# Altium PCB PCB.PcbDoc
Units mm, origin at the board's own origin, x right, y up, seen from the top; angles counter-clockwise.
Board outline 160 x 65 mm, 4 copper layers (Component Side, Ground Plane, Power Plane, Solder Side), stack 1.044 mm thick; 186 components, 132 nets, 803 pads, 49 vias.
Unrouted connection lines stored in the file: 493.
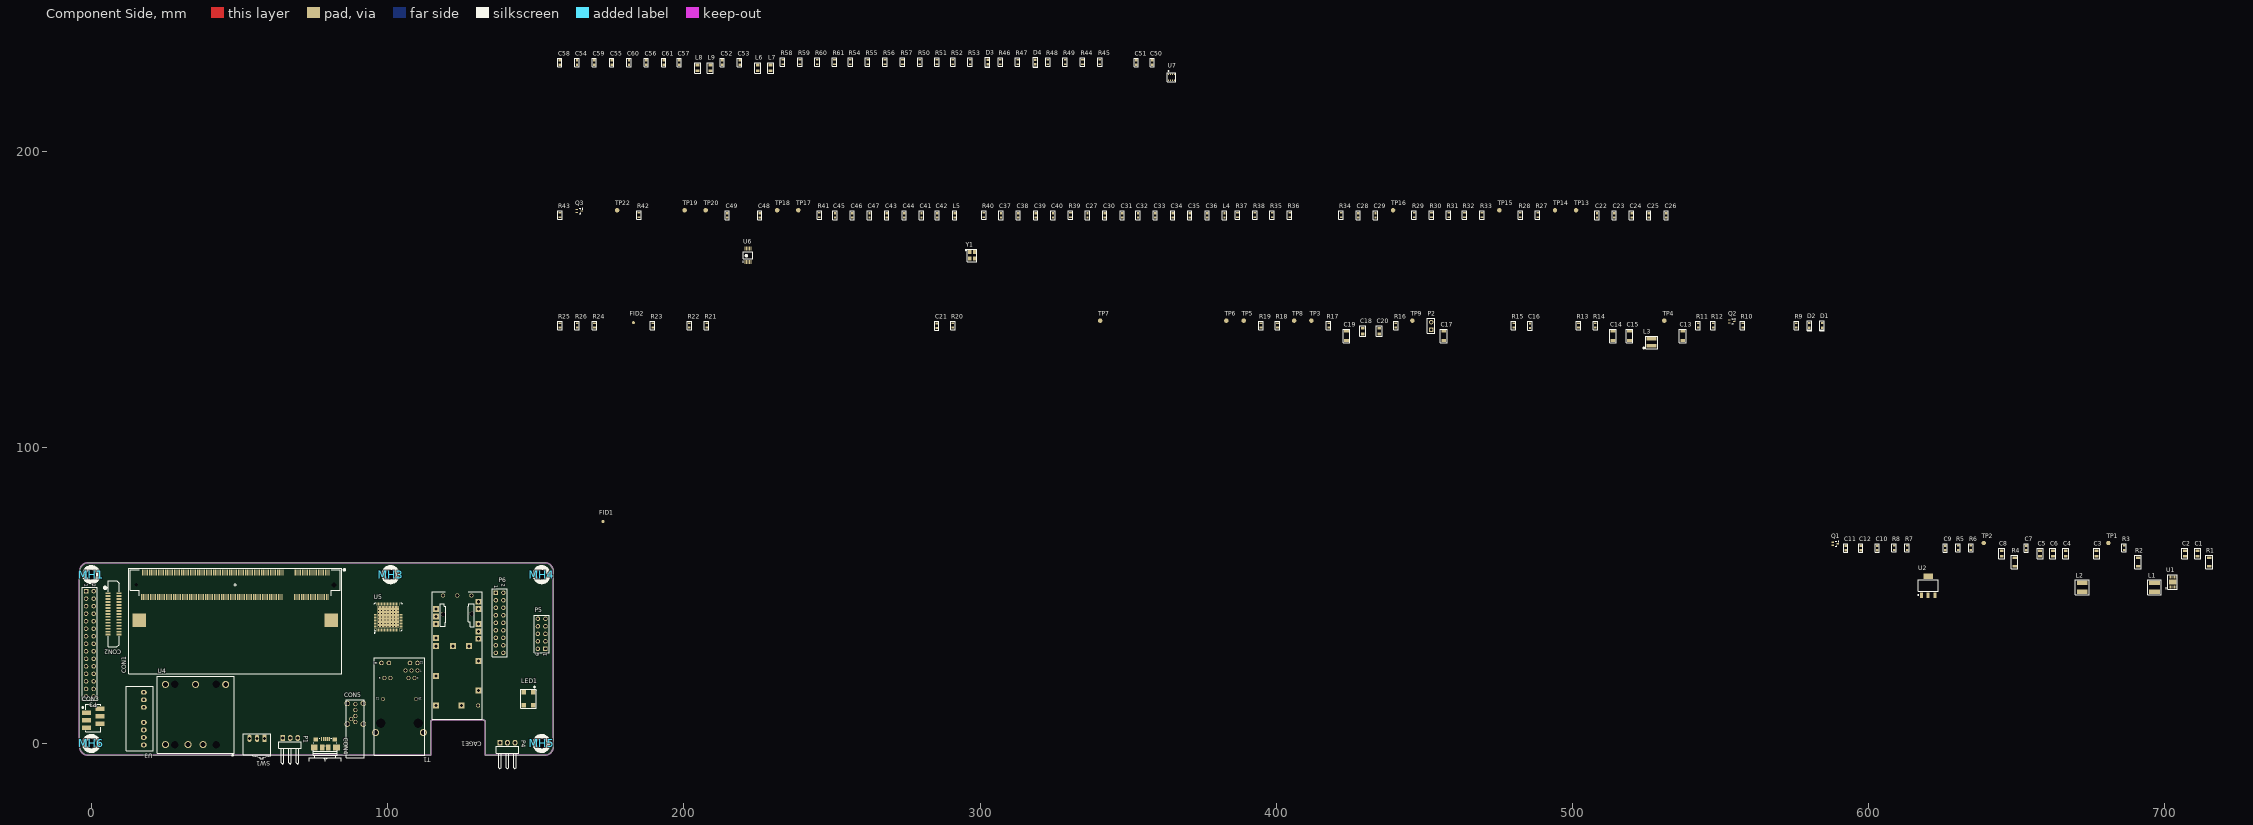
[diagram p0: Component Side view]
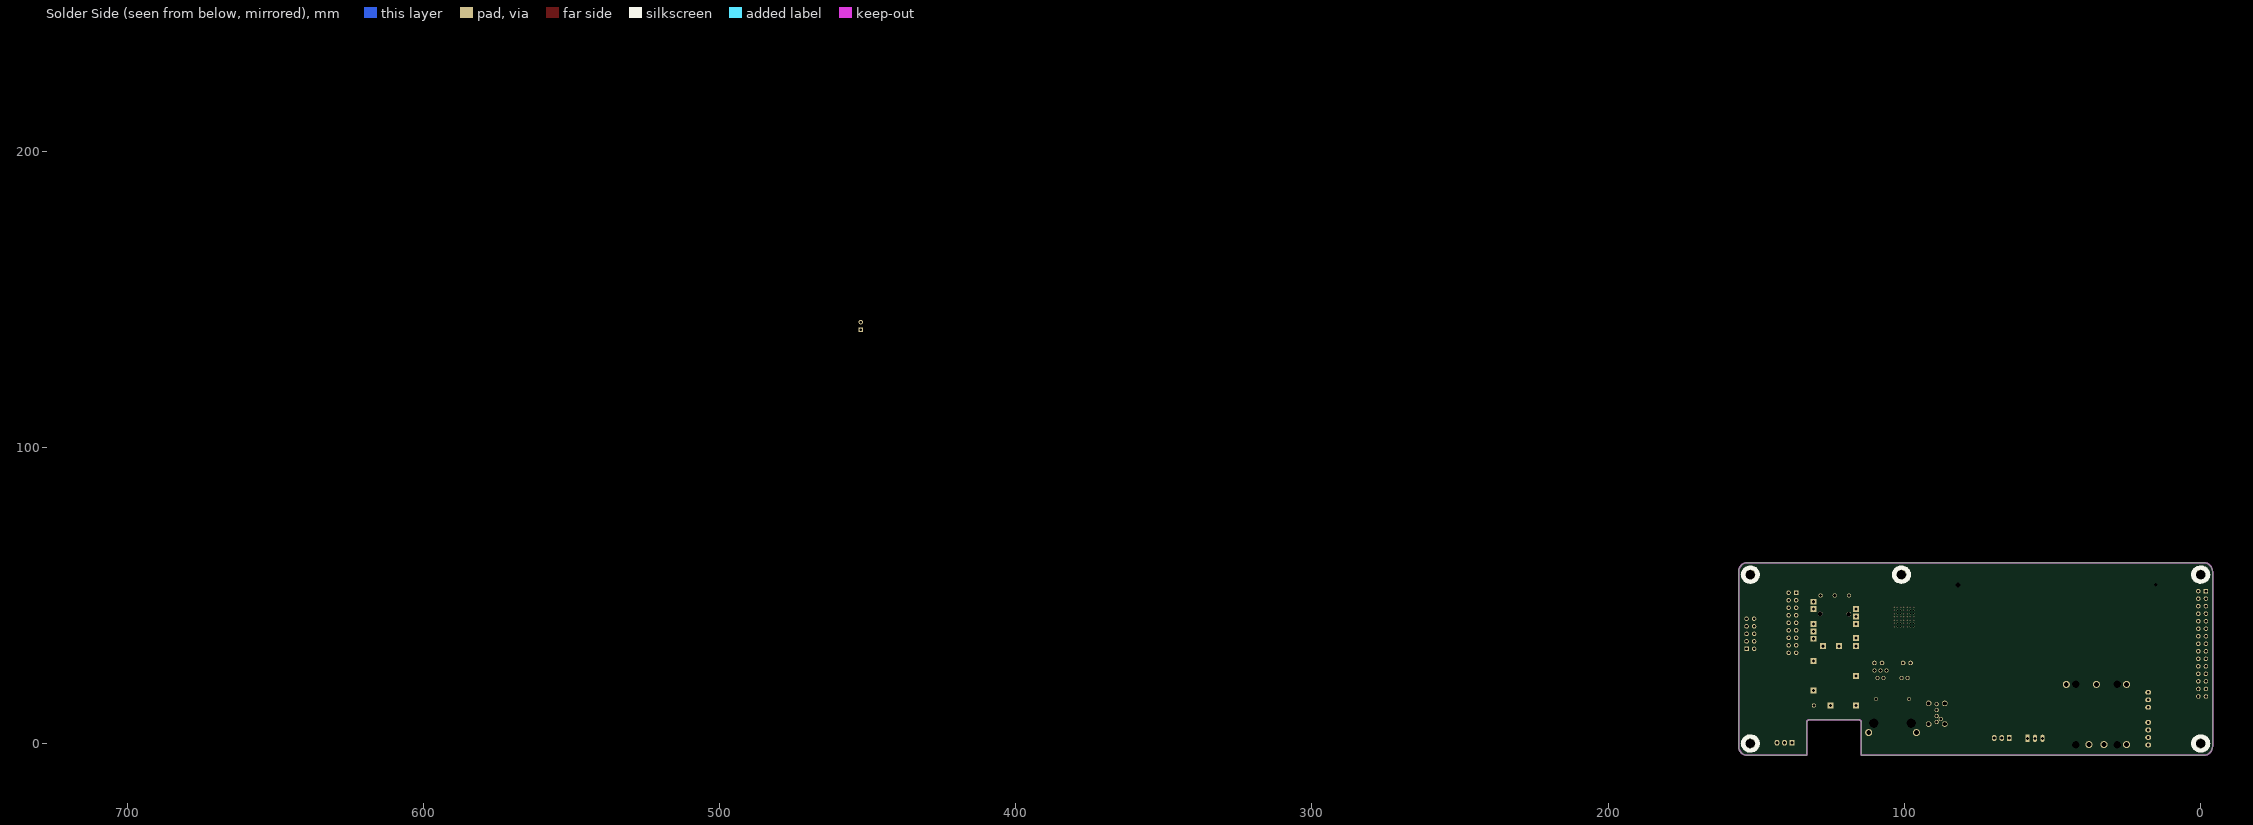
[diagram p1: Solder Side view, seen from below]
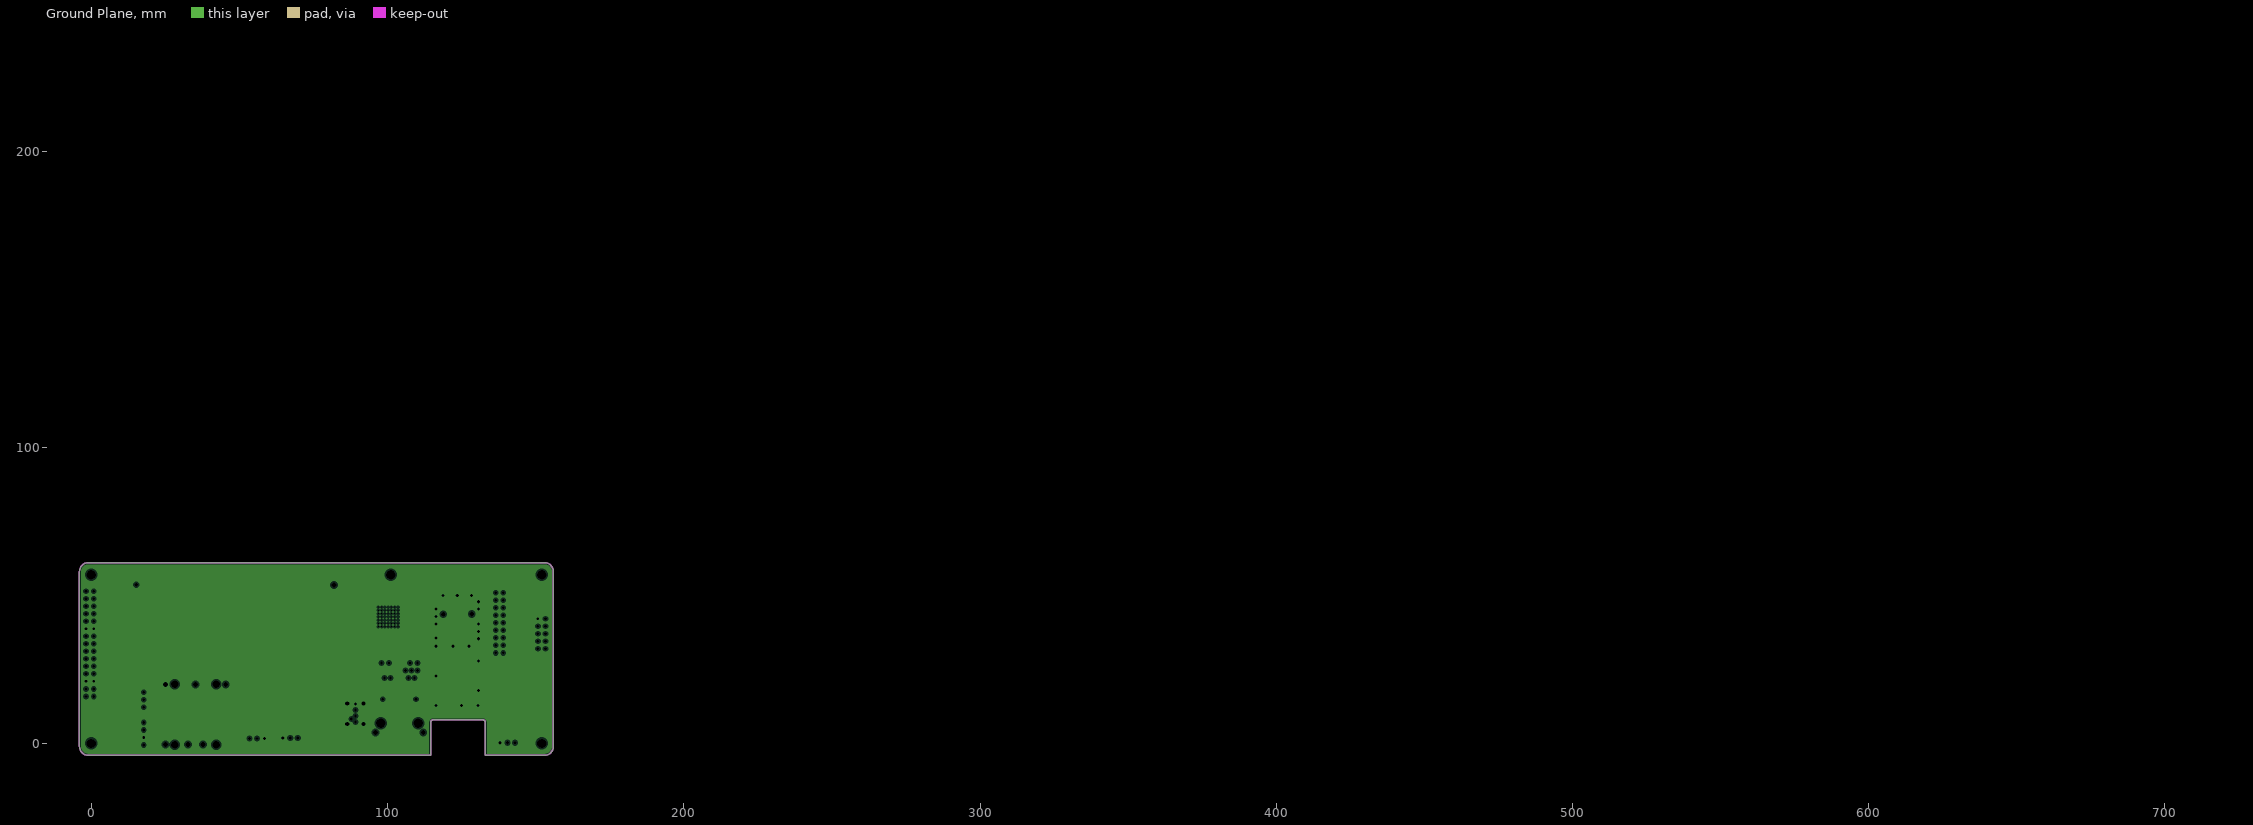
[diagram p2: Ground Plane, clearances drawn from the general rule]

## Layer stack, top to bottom
Top Solder: solder mask 0.0102, Solder Resist, Dk 3.5
Component Side: signal copper 0.04
Dielectric 1: core 0.24, FR-4, Dk 4.6
Ground Plane: plane copper 0.035, net GND
Dielectric 3: prepreg 0.4, R-1755M, Dk 4.6
Power Plane: signal copper 0.035
Dielectric 4: core 0.254, Dk 4.2
Solder Side: signal copper 0.04
Bottom Solder: solder mask 0.0102, Solder Resist, Dk 3.5

## Board outline
-4,58 -4,-1 -3.942,-1.585 -3.772,-2.148 -3.494,-2.667 -3.121,-3.121 -2.667,-3.494 -2.148,-3.772 -1.585,-3.942 -1,-4 114.5,-4 114.5,7 114.525,7.223 114.599,7.434 114.718,7.623 114.877,7.782 115.066,7.901 115.277,7.975 115.5,8 132,8 132.223,7.975 132.434,7.901 132.623,7.782 132.782,7.623 132.901,7.434 132.975,7.223 133,7 133,-4 153,-4 153.585,-3.942 154.148,-3.772 154.667,-3.494 155.121,-3.121 155.494,-2.667 155.772,-2.148 155.942,-1.585 156,-1 156,58 155.942,58.585 155.772,59.148 155.494,59.667 155.121,60.121 154.667,60.494 154.148,60.772 153.585,60.942 153,61 -1,61 -1.585,60.942 -2.148,60.772 -2.667,60.494 -3.121,60.121 -3.494,59.667 -3.772,59.148 -3.942,58.585

## Design rules (kind name [scope] priority, off if disabled: settings)
Clearance [All] p1: gap=0.152 except(0.03: SMDPad-SMDPad)
ComponentClearance [All] p1: gap=0 collisioncheckmode=3 verticalgap=0 showdistances=TRUE
DiffPairsRouting DiffPairsRouting_ETH [InDifferentialPairClass('ETH_100')] p1: maxlimit=0.213 minlimit=0.195 mostfreqgap=0.203 toplayer_minwidth=0.249 toplayer_maxwidth=0.274 toplayer_prefwidth=0.251 midlayer1_minwidth=0.249 midlayer1_maxwidth=0.274 midlayer1_prefwidth=0.251 bottomlayer_mingap=0.203 bottomlayer_minwidth=0.249 bottomlayer_maxwidth=0.274 bottomlayer_prefwidth=0.251 maxuncoupledlength=12.7
DiffPairsRouting DiffPairsRouting_USB [InDifferentialPairClass('USB_90')] p2: maxlimit=0.3 minlimit=0.19 mostfreqgap=0.254 toplayer_mingap=0.254 toplayer_maxgap=0.254 toplayer_minwidth=0.322 toplayer_maxwidth=0.347 toplayer_prefwidth=0.33 midlayer1_prefgap=0.203 midlayer1_minwidth=0.322 midlayer1_maxwidth=0.347 midlayer1_prefwidth=0.33 bottomlayer_mingap=0.254 bottomlayer_maxgap=0.254 bottomlayer_minwidth=0.322 bottomlayer_maxwidth=0.347 bottomlayer_prefwidth=0.33 maxuncoupledlength=12.7
DiffPairsRouting [All] p3: maxlimit=0.254 minlimit=0.152 mostfreqgap=0.254 toplayer_minwidth=0.152 toplayer_maxwidth=0.381 toplayer_prefwidth=0.203 midlayer1_mingap=0.254 midlayer1_minwidth=0.381 midlayer1_maxwidth=0.381 midlayer1_prefwidth=0.381 bottomlayer_minwidth=0.152 bottomlayer_maxwidth=0.381 bottomlayer_prefwidth=0.203 maxuncoupledlength=12.7
HoleSize [All] p1: absolutevalues=TRUE maxlimit=5 minlimit=0.3 maxpercent=80.000 minpercent=20.000
MatchedLengths camera [InDifferentialPairClass('CAMERA_DIFF')] p1: tolerance=0.254 checknetsindiffpair=TRUE checkdiffpairvsdiffpair=FALSE checkxsignals=FALSE checkothers=FALSE
MinimumSolderMaskSliver [All] p1: minsoldermaskwidth=0.05
PlaneClearance [All] p1: clearance=0.508
PlaneConnect [All] p1: planeconnectstyle=Direct reliefexpansion=0.508 reliefentries=2 reliefconductorwidth=0.254 reliefairgap=0.254
PolygonConnect [All] p1: connectstyle=Relief reliefconductorwidth=0.254 reliefentries=4 polygonreliefangle="90 Angle" airgapwidth=0.254
RoutingVias [All] p1: holewidth=0.38 width=0.635 viastyle="Through Hole" minholewidth=0.3 minwidth=0.508 maxholewidth=0.711 maxwidth=1.27
SilkToSolderMaskClearance [IsPad] p1: minsilkscreentomaskgap=0 clearancetoexposedcopper=TRUE
SolderMaskExpansion [All] p1: expansion=0.102
Width [All] p1: maxlimit=3 minlimit=0.152 preferedwidth=0.203 toplayer_maxwidth=2 bottomlayer_maxwidth=2 minimp=50.000000 maximp=50.000000 favimp=50.000000
23 further rules are at their usual default settings.

## Classes and differential pairs
differential pair class ETH_100: ETH_RX ETH_TX
differential pair class USB_90: USB_2 USB_CM USB_H USB_HUB USB_PROG USB_SW
component class "PAGE3 - HUB, USB, ETH": C22 C23 C24 C25 C26 C27 C28 C29 C30 C31 C32 C33 C34 C35 C36 C37 C38 C39 C40 C41 C42 C43 C44 C45 C46 C47 C48 C49 CON4 CON5 L4 L5 Q3 R27 R28 R29 R30 R31 R32 R33 R34 R35 R36 R37 R38 R39 R40 R41 R42 R43 T1 TP13 TP14 TP15 TP16 TP17 TP18 TP19 TP20 TP22 U5 U6 Y1
component class "PAGE2 - PWR, MODULE": C1 C2 C3 C4 C5 C6 C7 C8 C9 C10 C11 C12 C13 C14 C15 C16 C17 C18 C19 C20 C21 CON1 CON2 CON3 D1 D2 FID1 FID2 L1 L2 L3 LED1 MH1 MH3 MH4 MH5 MH6 P1 P2 P3 P4 P5 Q1 Q2 R1 R2 R3 R4 R5 R6 R7 R8 R9 R10 R11 R12 R13 R14 R15 R16 R17 R18 R19 R20 R21 R22 R23 R24 R25 R26 SW1 TP1 TP2 TP3 TP4 TP5 TP6 TP7 TP8 TP9 U1 U2 U3 U4
net class CAMERA_DIFF_100: CAM1_C_N CAM1_C_P CAM1_D0_N CAM1_D0_P CAM1_D1_N CAM1_D1_P
differential pair class CAMERA_DIFF_100: CAM1_C CAM1_D0 CAM1_D1
component class "PAGE4 - SFP": C50 C51 C52 C53 C54 C55 C56 C57 C58 C59 C60 C61 CAGE1 D3 D4 L6 L7 L8 L9 P6 R44 R45 R46 R47 R48 R49 R50 R51 R52 R53 R54 R55 R56 R57 R58 R59 R60 R61 U7
differential pair USB_SW: +USB_SW_P -USB_SW_N
differential pair USB_PROG: +USB_PROG_P -USB_PROG_N
differential pair USB_HUB: +USB_HUB_P -USB_HUB_N
differential pair USB_H: +USB_H_P -USB_H_N
differential pair USB_CM: +USB_CM_P -USB_CM_N
differential pair USB_2: +USB_2_P -USB_2_N
differential pair CAM1_D1: +CAM1_D1_P -CAM1_D1_N
differential pair CAM1_D0: +CAM1_D0_P -CAM1_D0_N
differential pair CAM1_C: +CAM1_C_P -CAM1_C_N
differential pair ETH_RX: +ETH_RX_P -ETH_RX_N
differential pair ETH_TX: +ETH_TX_P -ETH_TX_N

## Components (designator, comment, footprint, x,y, rotation, side; value= is the part's Value field where it differs from the comment)
C1 "47uF /10V" CAP0805 711.01,64.124 r90 top
C2 "10uF /16V" CAP0805 706.756,64.124 r90 top
C3 "47uF /10V" CAP0805 676.911,64.124 r90 top
C4 "10uF /16V" CAP0805 666.497,64.124 r90 top
C5 "10uF /16V" CAP0805 657.861,64.124 r90 top
C6 "10uF /16V" CAP0805 662.179,64.124 r90 top
C7 "100nF" CAP0603 653.225,65.965 r90 top
C8 "47uF /10V" CAP0805 644.907,64.124 r90 top
C9 "1uF /16V" CAP0603 625.793,65.965 r90 top
C10 "1uF /16V" CAP0603 602.933,65.965 r90 top
C11 "10uF /16V" CAP0603 592.265,65.965 r90 top
C12 "10uF /16V" CAP0603 597.345,65.965 r90 top
C13 "220pF /2kV" CAP1206 537.211,137.593 r90 top
C14 "10uF /50V" CAP1206 513.652,137.593 r90 top
C15 "10uF /50V" CAP1206 519.24,137.593 r90 top
C16 "100nF" CAP0603 485.649,141.022 r90 top
C17 "220pF /2kV" CAP1206 456.502,137.593 r90 top
C18 "1uF /16V" CAP0805 429.197,139.181 r90 top
C19 "10uF /50V" CAP1206 423.736,137.593 r90 top
C20 "10uF /16V" CAP0805 434.785,139.181 r90 top
C21 "100nF" CAP0603 285.433,141.022 r90 top
C22 "20pF" CAP0603 508.255,178.297 r90 top
C23 "20pF" CAP0603 514.097,178.297 r90 top
C24 "20pF" CAP0603 519.939,178.297 r90 top
C25 "20pF" CAP0603 525.781,178.297 r90 top
C26 "100nF" CAP0603 531.623,178.297 r90 top
C27 "100nF" CAP0603 336.297,178.297 r90 top
C28 "100nF" CAP0603 427.673,178.297 r90 top
C29 "100nF" CAP0603 433.515,178.297 r90 top
C30 "100nF" CAP0603 342.139,178.297 r90 top
C31 "100nF" CAP0603 347.981,178.297 r90 top
C32 "100nF" CAP0603 353.315,178.297 r90 top
C33 "100nF" CAP0603 359.157,178.297 r90 top
C34 "100nF" CAP0603 364.999,178.297 r90 top
C35 "100nF" CAP0603 370.841,178.297 r90 top
C36 "100nF" CAP0603 376.683,178.297 r90 top
C37 "100nF" CAP0603 307.087,178.297 r90 top
C38 "100nF" CAP0603 312.929,178.297 r90 top
C39 "100nF" CAP0603 318.771,178.297 r90 top
C40 "100nF" CAP0603 324.613,178.297 r90 top
C41 "33pF" CAP0603 280.226,178.297 r90 top
C42 "33pF" CAP0603 285.56,178.297 r90 top
C43 "1uF /16V" CAP0603 268.542,178.297 r90 top
C44 "100nF" CAP0603 274.384,178.297 r90 top
C45 "100nF" CAP0603 251.016,178.297 r90 top
C46 "100nF" CAP0603 256.858,178.297 r90 top
C47 "10uF /16V" CAP0603 262.7,178.297 r90 top
C48 "100nF" CAP0603 225.616,178.297 r90 top
C49 "10uF /16V" CAP0603 214.694,178.297 r90 top
C50 "100nF" CAP0603 358.077,229.922 r90 top
C51 "100nF" CAP0603 352.743,229.922 r90 top
C52 "100nF" CAP0603 212.98,229.922 r90 top
C53 "100nF" CAP0603 218.822,229.922 r90 top
C54 "10uF /16V" CAP0603 163.958,229.922 r90 top
C55 "10uF /16V" CAP0603 175.642,229.922 r90 top
C56 "10uF /16V" CAP0603 187.326,229.922 r90 top
C57 "10uF /16V" CAP0603 198.502,229.922 r90 top
C58 "100nF" CAP0603 158.116,229.922 r90 top
C59 "100nF" CAP0603 169.8,229.922 r90 top
C60 "100nF" CAP0603 181.484,229.922 r90 top
C61 "100nF" CAP0603 193.168,229.922 r90 top
CAGE1 "SFP_CAGE" PCB_SFP_CAGE_FOOTPRINT 120.147,39.577 r270 top locked
CON1 "1473005-4" BTB-SM0-6-2V200 48.577,53.567 r180 top
CON2 "1-1734248-5" 1-1734248-5 5.651,50.752 r270 top
CON3 "MICROMATCH 6 SMD" MICROMATCH2X3 -1.587,10.414 r90 top
CON4 "10104110-0001LF" 10118193 78.985,1.516 r0 top
CON5 "USB A, Right angle" "USB A, TH, RIGHT ANGLE" 89.101,7.271 r0 top
D1 "LED RED" LED0603 584.264,141.149 r90 top
D2 "LED RED" LED0603 579.946,141.149 r90 top
D3 "LED RED" LED0603 302.578,230.049 r90 top
D4 "LED RED" LED0603 318.644,230.049 r90 top
FID1 "FID_1MMC" FID_40X120D 172.72,74.93 r0 top
FID2 "FID_1MMC" FID_40X120D 183.008,142.038 r90 top
L1 "SRN4018-4R7M" INDP4040X18N 696.469,52.694 r90 top
L2 "SRN4018-4R7M" INDP4040X18N 672.085,52.694 r90 top
L3 "10uH / 500mA" IND1212 526.733,135.434 r90 top
L4 "BLM18EG221SN1D" CAP0603 382.525,178.297 r90 top
L5 "BLM18EG221SN1D" CAP0603 291.402,178.297 r90 top
L6 "1uH" CAP0805 224.981,228.081 r90 top
L7 "1uH" CAP0805 229.299,228.081 r90 top
L8 "1uH" CAP0805 204.661,228.081 r90 top
L9 "1uH" CAP0805 208.979,228.081 r90 top
LED1 "LED RGB WS2812" LED_SMD5050 147.574,15.05 r90 top
MH1 "MH_7.4MMNC_3.2MMD" MH_7.4MMD_3.2MMD_NON_COPPER_NPTH 0,57 r0 top
MH3 "MH_7.4MMNC_3.2MMD" MH_7.4MMD_3.2MMD_NON_COPPER_NPTH 101,57 r0 top
MH4 "MH_7.4MMNC_3.2MMD" MH_7.4MMD_3.2MMD_NON_COPPER_NPTH 152,57 r0 top
MH5 "MH_7.4MMNC_3.2MMD" MH_7.4MMD_3.2MMD_NON_COPPER_NPTH 152,0 r0 top
MH6 "MH_7.4MMNC_3.2MMD" MH_7.4MMD_3.2MMD_NON_COPPER_NPTH 0,0 r0 top
P1 "HDR1X3" HDR1X3H 64.579,1.841 r0 top
P2 "Header 2" HDR1X2 452.311,139.689 r90 top
P3 "MHDR2X15" HDR2X15 -1.778,51.435 r270 top
P4 "HDR1X3" HDR1X3H 137.922,0.254 r0 top
P5 "HDR2X5" HDR2X5_CEN 153.289,31.941 r90 top
P6 "HED2X9" HDR2X9 136.561,50.896 r270 top locked
Q1 "DMG1012T-7" DMG1012T-7 588.709,67.426 r0 top
Q2 "DMG1012T-7" DMG1012T-7 553.784,142.483 r0 top
Q3 "DMG1012T-7" DMG1012T-7 164.72,179.757 r0 top
R1 "0R" RES1206 714.947,61.266 r90 top
R2 "0R" RES1206 690.944,61.266 r90 top
R3 "100k" RES0603 686.245,66.092 r90 top
R4 "0R" RES1206 649.288,61.266 r90 top
R5 "100k" RES0603 630.175,66.092 r90 top
R6 "100k" RES0603 634.493,66.092 r90 top
R7 "470R" RES0603 612.966,66.092 r90 top
R8 "470R" RES0603 608.585,66.092 r90 top
R9 "47k" RES0603 575.565,141.149 r90 top
R10 "100k" RES0603 557.467,141.149 r90 top
R11 "1K8" RES0603 542.418,141.149 r90 top
R12 "1K8" RES0603 547.498,141.149 r90 top
R13 "1K8" RES0603 502.032,141.149 r90 top
R14 "1K8" RES0603 507.683,141.149 r90 top
R15 "0R" RES0603 480.124,141.149 r90 top
R16 "0R" RES0603 440.373,141.149 r90 top
R17 "0R" RES0603 417.704,141.149 r90 top
R18 "0R" RES0603 400.432,141.149 r90 top
R19 "0R" RES0603 394.844,141.149 r90 top
R20 "470R" RES0603 290.831,141.149 r90 top
R21 "0R" RES0603 207.709,141.149 r90 top
R22 "0R" RES0603 201.867,141.149 r90 top
R23 "0R" RES0603 189.485,141.149 r90 top
R24 "0R" RES0603 169.863,141.149 r90 top
R25 "0R" RES0603 158.179,141.149 r90 top
R26 "0R" RES0603 164.021,141.149 r90 top
R27 "0R" RES0603 488.252,178.424 r90 top
R28 "0R" RES0603 482.41,178.424 r90 top
R29 "49.9R" RES0603 446.533,178.424 r90 top
R30 "49.9R" RES0603 452.375,178.424 r90 top
R31 "49.9R" RES0603 458.217,178.424 r90 top
R32 "49.9R" RES0603 463.551,178.424 r90 top
R33 "10R" RES0603 469.456,178.424 r90 top
R34 "10k" RES0603 421.895,178.424 r90 top
R35 "1k" RES0603 398.59,178.424 r90 top
R36 "1k" RES0603 404.496,178.424 r90 top
R37 "12k4" RES0603 386.906,178.424 r90 top
R38 "10k" RES0603 392.748,178.424 r90 top
R39 "1M" RES0603 330.518,178.424 r90 top
R40 "12k" RES0603 301.308,178.424 r90 top
R41 "10k" RES0603 245.746,178.424 r90 top
R42 "47k" RES0603 184.849,178.424 r90 top
R43 "47k" RES0603 158.179,178.424 r90 top
R44 "470R" RES0603 334.582,230.049 r90 top
R45 "470R" RES0603 340.424,230.049 r90 top
R46 "0R" RES0603 306.833,230.049 r90 top
R47 "0R" RES0603 312.675,230.049 r90 top
R48 "0R" RES0603 322.898,230.049 r90 top
R49 "0R" RES0603 328.74,230.049 r90 top
R50 "0R" RES0603 279.655,230.049 r90 top
R51 "0R" RES0603 285.497,230.049 r90 top
R52 "0R" RES0603 290.831,230.049 r90 top
R53 "0R" RES0603 296.673,230.049 r90 top
R54 "0R" RES0603 256.223,230.049 r90 top
R55 "0R" RES0603 262.065,230.049 r90 top
R56 "0R" RES0603 267.907,230.049 r90 top
R57 "0R" RES0603 273.813,230.049 r90 top
R58 "1K8" RES0603 233.363,230.049 r90 top
R59 "1K8" RES0603 239.205,230.049 r90 top
R60 "1K8" RES0603 245.047,230.049 r90 top
R61 "1K8" RES0603 250.889,230.049 r90 top
SW1 "Switch right angle" "SW ANGLE 3PIN" 60.484,-3.785 r270 top
T1 "Ethernet RJ45" 0826-1L1T-57-F 109.088,22.098 r180 top
TP1 "TEST_POINT" TEST_POINT 680.911,67.68 r0 top
TP2 "TEST_POINT" TEST_POINT 638.811,67.68 r90 top
TP3 "TEST_POINT" TEST_POINT 411.862,142.737 r90 top
TP4 "TEST_POINT" TEST_POINT 530.988,142.737 r90 top
TP5 "TEST_POINT" TEST_POINT 389.002,142.737 r90 top
TP6 "TEST_POINT" TEST_POINT 383.16,142.737 r90 top
TP7 "TEST_POINT" TEST_POINT 340.551,142.737 r90 top
TP8 "TEST_POINT" TEST_POINT 406.02,142.737 r90 top
TP9 "TEST_POINT" TEST_POINT 445.961,142.737 r90 top
TP13 "TEST_POINT" TEST_POINT 501.206,180.011 r90 top
TP14 "TEST_POINT" TEST_POINT 494.094,180.011 r90 top
TP15 "TEST_POINT" TEST_POINT 475.298,180.011 r90 top
TP16 "TEST_POINT" TEST_POINT 439.421,180.011 r90 top
TP17 "TEST_POINT" TEST_POINT 238.634,180.011 r90 top
TP18 "TEST_POINT" TEST_POINT 231.522,180.011 r90 top
TP19 "TEST_POINT" TEST_POINT 200.28,180.011 r90 top
TP20 "TEST_POINT" TEST_POINT 207.392,180.011 r90 top
TP22 "TEST_POINT" TEST_POINT 177.483,180.011 r90 top
U1 "PAM2306AYPKE" WDFN12L 702.565,54.472 r0 top
U2 "REG1117" TI-DCY4_N 620.078,53.265 r90 top
U3 "ITX2409SA" DCDC_M1 17.716,17.272 r270 top
U4 "SPM15-050-Q12P-C" DCDC_M2 35.179,9.779 r90 top
U5 "LAN9512-JZX" QFN64 100.203,42.736 r90 top
U6 "FSUSB42MUX" MO-187 221.679,164.835 r90 top
U7 "BME280" "CAVITY MEMS" 364.618,224.969 r90 top
Y1 "25MHz" XTAL_SMALL 297.308,164.771 r90 top

## Footprints (in the part's own frame and the unit in brackets; to place one, negate y for a bottom-side part, rotate by r counter-clockwise, add the part's x,y. Pads: shape width x height; smd on the part's side, far side on the other; paste and mask are expansions set on the pad)
1-1734248-5 [mm] "flat cable connector"
  rect 0.6x1.65 smd: 1(0,3.725) 1(0,0) 2(1,3.725) 2(1,0) 3(2,3.725) 3(2,0) 4(3,3.725) 4(3,0) 5(4,3.725) 5(4,0) 6(5,3.725) 6(5,0) 7(6,3.725) 7(6,0) 8(7,0) 8(7,3.725) 9(8,0) 9(8,3.725) 10(9,0) 10(9,3.725) 11(10,0) 11(10,3.725) 12(11,0) 12(11,3.725) 13(12,0) 13(12,3.725) 14(13,0) 14(13,3.725) 15(14,0) 15(14,3.725)
  silkscreen extent -4.2,-1.37 18.17,3.81
0826-1L1T-57-F [mm] "Ethernet connector"
  round 1.408 hole 0.9: 1(0,0) 2(2.03,0) 5(8.12,0) 6(10.15,0) 7(-1.015,-2.54) 8(1.015,-2.54) 9(3.045,-2.54)
  round 1.25 hole 0.9: 10(-0.515,7.12) 11(10.665,7.12)
  round 1.53 hole 1.02: 12(-1.02,-5.08) 13(1.52,-5.08) 14(8.63,-5.08) 15(11.17,-5.08)
  round 2.4 hole 1.6: ""(-2.99,18.42) ""(13.14,18.42)
  round 0 hole 3.3 unplated: ""(-1.275,15.24) ""(11.425,15.24)
  silkscreen extent -3.43,-6.88 13.57,26.14, body extent -5.73,-6.87 15.89,26.15, height 16.34
10118193 [mm] "Creator MM"
  rect 0.4x1.4 smd mask+0.05: 1(-1.3,0) 2(-0.65,0) 3(0,0) 4(0.65,0) 5(1.3,0)
  rect 1.6x1.4 smd: 6(-3.2,-0.225) 7(3.2,-0.225)
  rect 2.3x1.9 smd: 8(-3.75,-2.85) 9(3.75,-2.85)
  rect 1.55x1.9 smd paste-10: 10(-1.025,-2.85) 11(1.025,-2.85)
  silkscreen extent -5.4,-7.47 5.4,0.27, body extent -4.04,-5.25 4.04,0.31, height 2.77
BTB-SM0-6-2V200 [mm]
  rect 0.35x2 smd: 1(-31.65,-4.1) 2(-31.35,4.1) 3(-31.05,-4.1) 4(-30.75,4.1) 5(-30.45,-4.1) 6(-30.15,4.1) 7(-29.85,-4.1) 8(-29.55,4.1) 9(-29.25,-4.1) 10(-28.95,4.1) 11(-28.65,-4.1) 12(-28.35,4.1) 13(-28.05,-4.1) 14(-27.75,4.1) 15(-27.45,-4.1) 16(-27.15,4.1) 17(-26.85,-4.1) 18(-26.55,4.1) 19(-26.25,-4.1) 20(-25.95,4.1) 21(-25.65,-4.1) 22(-25.35,4.1) 23(-25.05,-4.1) 24(-24.75,4.1) 25(-24.45,-4.1) 26(-24.15,4.1) 27(-23.85,-4.1) 28(-23.55,4.1) 29(-23.25,-4.1) 30(-22.95,4.1) 31(-22.65,-4.1) 32(-22.35,4.1) 33(-22.05,-4.1) 34(-21.75,4.1) 35(-21.45,-4.1) 36(-21.15,4.1) 37(-20.85,-4.1) 38(-20.55,4.1) 39(-20.25,-4.1) 40(-19.95,4.1) 41(-16.05,-4.1) 42(-15.75,4.1) 43(-15.45,-4.1) 44(-15.15,4.1) 45(-14.85,-4.1) 46(-14.55,4.1) 47(-14.25,-4.1) 48(-13.95,4.1) 49(-13.65,-4.1) 50(-13.35,4.1) 51(-13.05,-4.1) 52(-12.75,4.1) 53(-12.45,-4.1) 54(-12.15,4.1) 55(-11.85,-4.1) 56(-11.55,4.1) 57(-11.25,-4.1) 58(-10.95,4.1) 59(-10.65,-4.1) 60(-10.35,4.1) 61(-10.05,-4.1) 62(-9.75,4.1) 63(-9.45,-4.1) 64(-9.15,4.1) 65(-8.85,-4.1) 66(-8.55,4.1) 67(-8.25,-4.1) 68(-7.95,4.1) 69(-7.65,-4.1) 70(-7.35,4.1) 71(-7.05,-4.1) 72(-6.75,4.1) 73(-6.45,-4.1) 74(-6.15,4.1) 75(-5.85,-4.1) 76(-5.55,4.1) 77(-5.25,-4.1) 78(-4.95,4.1) 79(-4.65,-4.1) 80(-4.35,4.1) 81(-4.05,-4.1) 82(-3.75,4.1) 83(-3.45,-4.1) 84(-3.15,4.1) 85(-2.85,-4.1) 86(-2.55,4.1) 87(-2.25,-4.1) 88(-1.95,4.1) 89(-1.65,-4.1) 90(-1.35,4.1) 91(-1.05,-4.1) 92(-0.75,4.1) 93(-0.45,-4.1) 94(-0.15,4.1) 95(0.15,-4.1) 96(0.45,4.1) 97(0.75,-4.1) 98(1.05,4.1) 99(1.35,-4.1) 100(1.65,4.1) 101(1.95,-4.1) 102(2.25,4.1) 103(2.55,-4.1) 104(2.85,4.1) 105(3.15,-4.1) 106(3.45,4.1) 107(3.75,-4.1) 108(4.05,4.1) 109(4.35,-4.1) 110(4.65,4.1) 111(4.95,-4.1) 112(5.25,4.1) 113(5.55,-4.1) 114(5.85,4.1) 115(6.15,-4.1) 116(6.45,4.1) 117(6.75,-4.1) 118(7.05,4.1) 119(7.35,-4.1) 120(7.65,4.1) 121(7.95,-4.1) 122(8.25,4.1) 123(8.55,-4.1) 124(8.85,4.1) 125(9.15,-4.1) 126(9.45,4.1) 127(9.75,-4.1) 128(10.05,4.1) 129(10.35,-4.1) 130(10.65,4.1) 131(10.95,-4.1) 132(11.25,4.1) 133(11.55,-4.1) 134(11.85,4.1) 135(12.15,-4.1) 136(12.45,4.1) 137(12.75,-4.1) 138(13.05,4.1) 139(13.35,-4.1) 140(13.65,4.1) 141(13.95,-4.1) 142(14.25,4.1) 143(14.55,-4.1) 144(14.85,4.1) 145(15.15,-4.1) 146(15.45,4.1) 147(15.75,-4.1) 148(16.05,4.1) 149(16.35,-4.1) 150(16.65,4.1) 151(16.95,-4.1) 152(17.25,4.1) 153(17.55,-4.1) 154(17.85,4.1) 155(18.15,-4.1) 156(18.45,4.1) 157(18.75,-4.1) 158(19.05,4.1) 159(19.35,-4.1) 160(19.65,4.1) 161(19.95,-4.1) 162(20.25,4.1) 163(20.55,-4.1) 164(20.85,4.1) 165(21.15,-4.1) 166(21.45,4.1) 167(21.75,-4.1) 168(22.05,4.1) 169(22.35,-4.1) 170(22.65,4.1) 171(22.95,-4.1) 172(23.25,4.1) 173(23.55,-4.1) 174(23.85,4.1) 175(24.15,-4.1) 176(24.45,4.1) 177(24.75,-4.1) 178(25.05,4.1) 179(25.35,-4.1) 180(25.65,4.1) 181(25.95,-4.1) 182(26.25,4.1) 183(26.55,-4.1) 184(26.85,4.1) 185(27.15,-4.1) 186(27.45,4.1) 187(27.75,-4.1) 188(28.05,4.1) 189(28.35,-4.1) 190(28.65,4.1) 191(28.95,-4.1) 192(29.25,4.1) 193(29.55,-4.1) 194(29.85,4.1) 195(30.15,-4.1) 196(30.45,4.1) 197(30.75,-4.1) 198(31.05,4.1) 199(31.35,-4.1) 200(31.65,4.1)
  rect 4.5x4.6 smd: MP1(-32.45,12) MP2(32.45,12)
  round 0 hole 1.7 unplated: ""(-33.4,0)
  round 0 hole 1.2 unplated: ""(33.4,0)
  silkscreen extent -37.13,-5.59 36,29.97, body extent -35.75,-5 35.75,29.7, height 5.31
CAP0603 [mm]
  rect 0.8x0.8 smd: 1(-0.75,0) 2(0.75,0)
  silkscreen extent -1.46,-0.7 1.46,0.7, body extent -0.8,-0.4 0.8,0.4, height 0.9
CAP0805 [mm]
  rect 0.9x1.3 smd: 1(-0.95,0) 2(0.95,0)
  silkscreen extent -1.78,-1.02 1.78,1.02, body extent -1,-0.6 1,0.6, height 1.5
CAP1206 [mm]
  rect 0.9x1.6 smd: 1(-1.55,0) 2(1.55,0)
  silkscreen extent -2.29,-1.14 2.29,1.14, body extent -1.6,-0.8 1.6,0.8, height 0.94
"CAVITY MEMS" [mm]
  rect 0.5x0.35 smd: 1(1.025,0.975) 2(1.025,0.325) 3(1.025,-0.325) 4(1.025,-0.975) 5(-1.025,-0.975) 6(-1.025,-0.325) 7(-1.025,0.325) 8(-1.025,0.975)
  silkscreen extent -1.5,-1.37 2.1,1.38, body extent -1.25,-1.25 1.25,1.25, height 0.93
DCDC_M1 [mm]
  oval 1.6x2 hole 0.9: 1(0,0) 2(2.54,0) 3(5.08,0) 5(10.16,0) 6(12.7,0) 7(15.24,0) 8(17.78,0)
  silkscreen extent -2,-6 19.78,3.2, body extent -2,-6 19.78,3.2, height 10.6
DCDC_M2 [mm]
  round 2.4 hole 1.6: 1(-10.16,-2.54) 2(-10.16,2.54) 3(10.16,-10.16) 4(10.16,0) 5(10.16,10.16) 6(-10.16,10.16)
  round 0 hole 2.54 unplated: ""(-10.16,-6.98) ""(-10.16,6.99) ""(10.16,-6.98) ""(10.16,6.99)
  silkscreen extent -14,-13 13,13, body extent -13,-13 13,13, height 10.41
DMG1012T-7 [mm] "SOT23, 3-Leads, Body 1.60x1.60mm, Pitch 0.50mm, IPC Medium Density"
  rect 0.85x0.4 smd: 1(0.85,0) 2(-0.85,0.5) 3(-0.85,-0.5)
  silkscreen extent -0.08,-0.85 1.2,0.87, body extent -0.97,-0.85 0.98,0.85, height 0.8
FID_40X120D [mil]
  round 40 smd paste-40 mask+40: 1(0,0)
HDR1X2 [mm] "Connector; Header; 2 Position"
  rect 1.5x1.5 hole 0.9: 1(0,0)
  round 1.5 hole 0.9: 2(2.54,0)
  silkscreen extent -1.27,-1.27 3.81,1.27
HDR1X3H [mm] "Connector; Header; 3 Position; Right Angle"
  rect 1.6x2 hole 1.1: 1(0,0)
  oval 1.6x2 hole 1.1: 2(2.54,0) 3(5.08,0)
  silkscreen extent -1.27,-8.85 6.35,-1.27, body extent -1.33,-10.14 6.29,0.34, height 3.1
HDR2X5_CEN [mm] "Connector; Header; 5x2 Position"
  rect 1.5x1.5 hole 0.9: 1(0,0)
  round 1.5 hole 0.9: 2(2.54,0) 3(5.08,0) 4(7.62,0) 5(10.16,0) 6(0,2.54) 7(2.54,2.54) 8(5.08,2.54) 9(7.62,2.54) 10(10.16,2.54)
  silkscreen extent -1.27,-1.27 11.43,3.81, body extent -1.27,-1.27 11.43,3.81, height 9.5
HDR2X9 [mm] "Connector; Header; 9x2 Position"
  rect 1.5x1.5 hole 0.9: 1(0,0)
  round 1.5 hole 0.9: 2(0,2.54) 3(2.54,0) 4(2.54,2.54) 5(5.08,0) 6(5.08,2.54) 7(7.62,0) 8(7.62,2.54) 9(10.16,0) 10(10.16,2.54) 11(12.7,0) 12(12.7,2.54) 13(15.24,0) 14(15.24,2.54) 15(17.78,0) 16(17.78,2.54) 17(20.32,0) 18(20.32,2.54)
  silkscreen extent -1.27,-1.27 21.59,3.81, body extent -1.27,-1.23 21.59,3.77, height 8.01
HDR2X15 [mm] "Connector; Header; 15x2 Position"
  rect 1.5x1.5 hole 0.9: 1(0,0)
  round 1.5 hole 0.9: 2(0,2.54) 3(2.54,0) 4(2.54,2.54) 5(5.08,0) 6(5.08,2.54) 7(7.62,0) 8(7.62,2.54) 9(10.16,0) 10(10.16,2.54) 11(12.7,0) 12(12.7,2.54) 13(15.24,0) 14(15.24,2.54) 15(17.78,0) 16(17.78,2.54) 17(20.32,0) 18(20.32,2.54) 19(22.86,0) 20(22.86,2.54) 21(25.4,0) 22(25.4,2.54) 23(27.94,0) 24(27.94,2.54) 25(30.48,0) 26(30.48,2.54) 27(33.02,0) 28(33.02,2.54) 29(35.56,0) 30(35.56,2.54)
  silkscreen extent -1.27,-1.27 36.83,3.81, body extent -1.27,-1.23 36.83,3.77, height 8.01
IND1212 [mm]
  rect 1.2x3.4 smd: 1(-1.2,0) 2(1.2,0)
  silkscreen extent -2.12,-2 2.1,2.92, body extent -1.51,-1.5 1.51,1.5, height 1.4
INDP4040X18N [mm] "Precision Wire Wound Inductor, 2-Leads, Body 4.00x4.00mm, IPC Medium Density"
  rect 1.5x3.6 smd: 1(-1.525,0) 2(1.525,0)
  silkscreen extent -2.5,-2.35 2.5,2.35, body extent -2.17,-2 2.03,2, height 1.9
LED0603 [mm]
  rect 0.8x0.8 smd: 1(-0.8,0) 2(0.8,0)
  silkscreen extent -1.78,-0.76 1.52,0.76, body extent -0.85,-0.4 0.85,0.4, height 0.66
LED_SMD5050 [mm]
  rect 1.5x1.5 smd: 1(2.2,-1.6) 2(2.2,1.6) 3(-2.2,1.6) 4(-2.2,-1.6)
  silkscreen extent -3.2,-2.6 4.2,2.6, body extent -2.7,-2.5 2.7,2.5, height 1.71
MH_7.4MMD_3.2MMD_NON_COPPER_NPTH [mm] "Creator MM"
  round 3.2 hole 3.2 unplated mask+0.025: 1(0,0)
  silkscreen extent -3,-3 3,3
MICROMATCH2X3 [mm]
  rect 1.5x3 smd: 1(0,0) 2(-2.54,0) 3(-5.08,0) 4(1.27,-4.5) 5(-1.27,-4.5) 6(-3.81,-4.5)
  silkscreen extent -6.5,-4.8 2.9,1.52, body extent -6.68,-5.95 2.87,1.17, height 5.26
MO-187 [mm] "MSOP, 10-Leads, Body 3.00x3.00mm, Pitch 0.50mm, IPC Medium Density"
  rect 1.35x0.3 smd: 1(-2.225,1) 2(-2.225,0.5) 3(-2.225,0) 4(-2.225,-0.5) 5(-2.225,-1) 6(2.225,-1) 7(2.225,-0.5) 8(2.225,0) 9(2.225,0.5) 10(2.225,1)
  silkscreen extent -2.35,-1.55 1.15,1.82, body extent -1.55,-1.55 1.55,1.55, height 1.1
PCB_SFP_CAGE_FOOTPRINT [mm]
  round 1.4 hole 1.067: 21(-10.387,8.163) 21(-10.387,-1.439) 21(-10.387,3.361) 21(26.75,10.425)
  rect 2x2 hole 1.05: 21(-8.279,10.499) 21(-5.764,10.499) 21(-5.764,-3.75) 21(-3.275,-3.75) 21(-0.786,10.499) 21(-0.786,-3.75) 21(1.729,10.499) 21(3.913,-3.75) 21(4.229,10.499) 21(6.733,7.324) 21(6.733,-3.75) 21(6.733,1.94) 21(11.736,10.499) 21(16.74,-3.75) 21(21.744,10.499) 21(26.748,-3.75) 21(26.748,4.835)
  round 1.55 hole 1.55 unplated: ""(-4.15,8.225) ""(-4.1,-1.4)
  silkscreen extent -11.66,-4.99 31.47,11.81, body extent -10.6,-4.62 38.2,11.22, height 10.67
QFN64 [mm]
  rect 0.95x0.25 smd: 1(-4.375,3.75) 2(-4.375,3.25) 3(-4.375,2.75) 4(-4.375,2.25) 5(-4.375,1.75) 6(-4.375,1.25) 7(-4.375,0.75) 8(-4.375,0.25) 9(-4.375,-0.25) 10(-4.375,-0.75) 11(-4.375,-1.25) 12(-4.375,-1.75) 13(-4.375,-2.25) 14(-4.375,-2.75) 15(-4.375,-3.25) 16(-4.375,-3.75) 33(4.375,-3.75) 34(4.375,-3.25) 35(4.375,-2.75) 36(4.375,-2.25) 37(4.375,-1.75) 38(4.375,-1.25) 39(4.375,-0.75) 40(4.375,-0.25) 41(4.375,0.25) 42(4.375,0.75) 43(4.375,1.25) 44(4.375,1.75) 45(4.375,2.25) 46(4.375,2.75) 47(4.375,3.25) 48(4.375,3.75)
  rect 0.25x0.95 smd: 17(-3.75,-4.375) 18(-3.25,-4.375) 19(-2.75,-4.375) 20(-2.25,-4.375) 21(-1.75,-4.375) 22(-1.25,-4.375) 23(-0.75,-4.375) 24(-0.25,-4.375) 25(0.25,-4.375) 26(0.75,-4.375) 27(1.25,-4.375) 28(1.75,-4.375) 29(2.25,-4.375) 30(2.75,-4.375) 31(3.25,-4.375) 32(3.75,-4.375) 49(3.75,4.375) 50(3.25,4.375) 51(2.75,4.375) 52(2.25,4.375) 53(1.75,4.375) 54(1.25,4.375) 55(0.75,4.375) 56(0.25,4.375) 57(-0.25,4.375) 58(-0.75,4.375) 59(-1.25,4.375) 60(-1.75,4.375) 61(-2.25,4.375) 62(-2.75,4.375) 63(-3.25,4.375) 64(-3.75,4.375)
  rect 7.3x7.3 smd: 65(0,0)
  silkscreen extent -5.47,-4.7 4.7,4.7, body extent -4.55,-4.55 4.55,4.55, height 1
RES0603 [mm]
  rect 0.6x0.9 smd: 1(-0.75,0) 2(0.75,0)
  silkscreen extent -1.4,-0.76 1.4,0.76, body extent -0.8,-0.42 0.8,0.42, height 0.8
RES1206 [mm]
  rect 0.9x1.6 smd: 1(-1.45,0) 2(1.45,0)
  silkscreen extent -2.2,-1.1 2.2,1.1, body extent -1.6,-0.8 1.6,0.8, height 1
"SW ANGLE 3PIN" [mm]
  oval 2.5x1.4 hole 1: 1(-5.5,-4.54) 3(-5.5,-7.08)
  rect 2.5x1.4 hole 1: 2(-5.5,-2)
  silkscreen extent -7,-9.28 1.3,0, body extent -4.9,-9.3 1.3,0, height 2.5
TEST_POINT [mm]
  round 1.5 smd: 1(0,0)
TI-DCY4_N [mm] "SOT223, 4-Leads, Body 6.5x3.5mm, Pitch 2.3mm, IPC Medium Density"
  rect 1.85x1 smd: 1(-3.175,2.3) 2(-3.175,0) 3(-3.175,-2.3)
  rect 1.85x3.2 smd: 2(3.175,0)
  silkscreen extent -3.3,-3.35 1.95,3.47, body extent -3.48,-3.25 3.48,3.25, height 1.69
"USB A, TH, RIGHT ANGLE" [mm]
  round 1.4 hole 1: 1(0,0) 2(0,2) 3(0,4) 4(0,6) 5(-1.36,1)
  round 1.9 hole 1.4: 6(-2.72,-0.73) 6(-2.72,6.27) 6(2.72,-0.73) 6(2.72,6.27)
  silkscreen extent -3,-12 3,7.5, body extent -3.5,-12.1 3.7,7.1, height 14.45
WDFN12L [mm] "Small 12L WDFN3x3 Package"
  rect 0.25x1 smd: 1(-1.125,-1.7) 2(-0.675,-1.7) 3(-0.225,-1.7) 4(0.225,-1.7) 5(0.675,-1.7) 6(1.125,-1.7) 7(1.125,1.7) 8(0.675,1.7) 9(0.225,1.7) 10(-0.225,1.7) 11(-0.675,1.7) 12(-1.125,1.7)
  rect 2.5x1.7 smd: 13(0,0)
  silkscreen extent -2.32,-2.45 1.6,2.45, body extent -1.5,-1.5 1.5,1.5, height 0.8
XTAL_SMALL [mm] "3.2 X 2.5 mm SMD crystal"
  rect 1.4x1.1 smd: 1(1.1,0.8) 2(-1.1,-0.8) 3(-1.1,0.8) 3(1.1,-0.8)
  silkscreen extent -2.1,-1.6 2.1,2.25, body extent -1.6,-1.25 1.6,1.25, height 0.7

## Part data
C1 C3 C8: library part GRM21BR61A476ME15L, "MURATA - GRM21BR61A476ME15L - CAP, MLCC, X5R, 47UF, 10V, 0805"
C2 C4 C5 C6 C20: library part CGA4J1X5R1C106K125AC, "TDK - CGA4J1X5R1C106K125AC - CAP, MLCC, X5R, 10UF, 16V, 0805"
C7 C16 C21 C26 C27 C30 C31 C32 C33 C34 C35 C36 C37 C38 C39 C40 C44 C45 C46 C48 C50 C51 C52 C53 C58 C59 C60 C61: "MURATA - GRM188R71C104KA01J - CAP, MLCC, X7R, 0.1UF, 16V, 0603"
C9 C10 C43: library part GRM188R61C105KA12D, "MURATA - GRM188R61C105KA12D - CAP, MLCC, X5R, 1UF, 16V, 0603"
C11 C12 C47 C49 C54 C55 C56 C57: library part GRM188R61C106MA73D, "MURATA - GRM188R61C106MA73D - CAP, MLCC, X5R, 10UF, 16V, 0603"
C13 C17: library part C1206C221KGRACTU, "KEMET - C1206C221KGRACTU - CAP, MLCC, X7R, 220PF, 2KV, 1206"
C14 C15 C19: library part GRM31CR61H106KA12L, "MURATA - GRM31CR61H106KA12L - CAP, MLCC, X5R, 10UF, 50V, 1206"
C18: library part GRM21BR71C105KA01L, "MURATA - GRM21BR71C105KA01L - CAP, MLCC, X7R, 1UF, 16V, 0805"
C22 C23 C24 C25: library part GRM1885C1H200JA01D, "MURATA - GRM1885C1H200JA01D - CAPACITOR, MLCC, C0G, 20PF, 50V, 0603"
C28 C29: library part Cap, "Capacitor"
C41 C42: library part GRM1885C1H330JA01D, "MURATA - GRM1885C1H330JA01D - CAP, MLCC, C0G/NP0, 33PF, 50V, 0603"
CAGE1: library part SFP_CAGE_FOOTPRINT, "TE CONNECTIVITY - 2007194-1 - CAGE, 1X1, SFP+, PCI APPLICATIONS"
CON1: library part "RPi CM CON", "DDR2 SODIMM connector for Raspberry Pi compute module 1/3/3-Lite"
CON2: library part "Camera con 15 pin", "Raspberry Pi camera connector"
CON3: library part 188275-6, "AMP - TE CONNECTIVITY - 188275-6 - CONNECTOR, RCPT, 6POS, 2ROW, 1.27MM"
CON4: "AMPHENOL FCI - 10104110-0001LF - MICRO USB, 2.0 TYPE B, RECEPTACLE, SMT"
CON5: library part 73725-0110BLF, "AMPHENOL FCI - 73725-0110BLF - USB, 2.0 TYPE A, RECEPTACLE, TH"
D1 D2 D3 D4: library part HSMS-C190, "BROADCOM LIMITED - HSMS-C190 - LED, RED, 10MCD, 626NM"
FID1 FID2: "Fiducial 40mil Diameter, 120mil Mask"
L1 L2: library part Inductor
L3: library part LQH3NPN100MG0L, "Fixed Inductors 1212 10uH 20%"
L4 L5: "MURATA - BLM18EG221SN1D - FERRITE BEAD, 0.05OHM, 2A, 0603"
L6 L7 L8 L9: library part 74479773210, "WURTH ELEKTRONIK - 74479773210 - INDUCTOR, MULTILAYER, 1UH, SMD"
LED1: library part WS2812, "LED RGB WS2812 OR SK6812 1=10"
MH1 MH3 MH4 MH5 MH6: "Mounting Hole 7.4mm Diameter (Non Copper), 3.2mm Drill NPTH"
P1 P4: library part "Header1X3, Right Angle", "Header1X3, Right Angle"
P2: "Header, 2-Pin"
P3: "Header, 15-Pin, Dual row"
P5: library part MHDR2X5
P6: library part MHDR2X9, "Header, 9-Pin, Dual row"
Q1 Q2 Q3: "MOSFET MOSFET N-CHANNEL SOT-523"
R1 R2 R4: library part "MCMR12X000 PTL", "MULTICOMP - MCMR12X000 PTL - RES, CERAMIC, 0R, 0.05OHM, 0.25W, 1206"
R3 R5 R6 R10: library part "MCMR06X104 JTL", "MULTICOMP - MCMR06X104 JTL - RES, CERAMIC, 100K, 5%, 0.1W, 0603"
R7 R8 R20 R44 R45: library part "MCMR06X471 JTL", "MULTICOMP - MCMR06X471 JTL - RES, CERAMIC, 470R, 5%, 0.1W, 0603"
R9 R42 R43: library part MCMR06X4702FTL, "MULTICOMP - MCMR06X4702FTL - RES, CERAMIC, 47K, 1%, 0.1W, 0603"
R11 R12 R13 R14 R58 R59 R60 R61: library part CRCW06031K80FKEA, "VISHAY - CRCW06031K80FKEA - RES, THICK FILM, 1K8, 1%, 0.1W, 0603"
R15 R16 R17 R18 R19 R21 R22 R23 R24 R25 R26 R27 R28 R46 R47 R48 R49 R50 R51 R52 R53 R54 R55 R56 R57: library part CR0603-J/-000ELF, "BOURNS - CR0603-J/-000ELF - RES, THICK FILM, 0R, 5%, 0.1W, 0603"
R29 R30 R31 R32: library part CRCW060349R9FKEA, "VISHAY - CRCW060349R9FKEA - RES, THICK FILM, 49R9, 1%, 0.1W, 0603"
R33: library part RCA060310R0FKEA, "VISHAY - RCA060310R0FKEA - RES, AUTO, THICK FILM, 10R, 1%, 0603"
R34 R38 R41: library part "MCMR06X103 JTL", "MULTICOMP - MCMR06X103 JTL - RES, CERAMIC, 10K, 5%, 0.1W, 0603"
R35 R36: library part "MCMR06X102 JTL", "MULTICOMP - MCMR06X102 JTL - RES, CERAMIC, 1K, 5%, 0.1W, 0603"
R37: library part MC0063W0603112K4, "MULTICOMP - MC0063W0603112K4 - RES, THICK FILM, 12K4, 1%, 0.063W, 0603"
R39: library part MC0063W060311M, "MULTICOMP - MC0063W060311M - RES, THICK FILM, 1M, 1%, 0.063W, 0603"
R40: library part MC0063W0603112K, "MULTICOMP - MC0063W0603112K - RES, THICK FILM, 12K, 1%, 0.063W, 0603"
SW1: library part 450302014072, "WURTH ELEKTRONIK - 450302014072 - SWITCH, SLIDE, MINI, ON-ON, RIGHT ANGLE"
T1: "1 Port RJ45 Magjack Connector Through Hole 10/100 Base-T, AutoMDIX, Power over Ethernet (PoE)"
TP1 TP2 TP3 TP4 TP5 TP6 TP7 TP8 TP9 TP13 TP14 TP15 TP16 TP17 TP18 TP19 TP20 TP22: "Test point"
U1: "Voltage Regulators - Switching Regulators Dual PWM Step-Down 40uA 1A 1.5MHz"
U2: "TEXAS INSTRUMENTS - REG1117 - V REG LDO ADJ +1.5/13.7V, SMD, 1117"
U3: "Isolated Board Mount DC/DC Converter, 2:1 Input, Fixed, 1 Output, 18 V, 36 V, 6 W, 9 V"
U4: "Isolated Board Mount DC/DC Converter, Medical, Fixed, 1 Output, 9 V, 36 V, 15 W, 5 V"
U5: library part LAN9512, "USB 2.0 Hub and 10/100  Ethernet Controller"
U6: "FAIRCHILD SEMICONDUCTOR - FSUSB42MUX - USB SWITCH, DUAL, DPDT, MSOP-10"
U7: "Board Mount Humidity Sensors"
Y1: library part ABM8-25.000MHZ-B2-T, "ABRACON - ABM8-25.000MHZ-B2-T - CRYSTAL, 25M, 18PF CL, 3.2X2.5MM SMT"

## Free pads (board coordinates)
  round 3.2 hole 3.2: 1(0,0) 1(0,57) 1(101,57) 1(152,0) 1(152,57)

## Via types
v1: diameter 0.5, hole 0.2, Component Side to Solder Side, 49 vias

## Nets (pads, with @x,y where several pads share a name; then routed paths per layer and width w, separated by ;. In a path a pad name is that pad's centre, name@x,y a point inside that pad or via, vN(x,y) a via of type N, cw(c..) or ccw(c..) an arc to the next point about the centre after c; other vN are vias at no path point)
1V8: C4.2 L2.2 R4.1 R10.2 TP2.1 U1.10
3V3: C2.2 C9.2 C10.2 C27.2 C30.2 C31.2 C32.2 C33.2 C48.1 CON1.39 CON1.40 CON1.41 CON1.42 L1.2 L4.1 R2.1 R7.2 R8.2 R11.2 R12.2 R13.2 R14.2 R15.1 R22.2 R24.1 R34.2 R35.1 R36.1 R38.2 R41.2 R42.1 SW1.3 TP1.1 U1.4 U5.11 U5.19 U5.27 U5.33 U5.39 U5.40 U5.46 U6.1
5V: C5.2 C6.2 C11.2 C18.2 C20.2 C21.2 C49.2 CON5.1 LED1.3 P4.3 R1.1 R3.2 R23.1 R25.1 R26.2 TP9.1 U1.1 U1.6 U1.7 U2.3 U4.3
+9V: C13.2 CON3.1 TP4.1 U3.6
CAM1/GPIO0/SDA0: CON1.3 CON2.14 R14.1
CAM1/GPIO1/SCL0: CON1.5 CON2.13 R13.1
CAM1_C_N: CON1.149 CON2.8
CAM1_C_P: CON1.147 CON2.9
CAM1_CLK: CON1.17 CON2.12
CAM1_D0_N: CON1.161 CON2.2
CAM1_D0_P: CON1.159 CON2.3
CAM1_D1_N: CON1.155 CON2.5
CAM1_D1_P: CON1.153 CON2.6
CAM1_GPIO: CON1.15 CON2.11
CM_1V8: C8.2 CON1.183 CON1.184 CON1.185 CON1.186 R4.2
CM_3V3: C3.2 CON1.189 CON1.190 CON1.191 CON1.192 CON1.193 CON1.194 R2.2
CM_VBAT: C1.2 CON1.197 CON1.198 CON1.199 CON1.200 R1.2
EMMC_DISABLE_N: CON1.2 Q1.1
EMMC_EN_N_1V8: CON1.90 Q2.2 R10.1
ETH_RX_N: C25.1 R32.2 T1.9 TP15.1 U5.53
ETH_RX_P: C24.1 R31.2 T1.2 TP16.1 U5.52
ETH_TX_N: C23.1 R30.2 T1.8 TP13.1 U5.56
ETH_TX_P: C22.1 R29.2 T1.1 TP14.1 U5.55
GND: C1.1 C2.1 C3.1 C4.1 C5.1 C6.1 C7.1 C8.1 C9.1 C10.1 C11.1 C12.1 C16.2 C17.2 C18.1 C20.1 C21.1 C22.2 C23.2 C24.2 C25.2 C26.2 C27.1 C28.1 C29.1 C30.1 C31.1 C32.1 C33.1 C34.1 C35.1 C36.1 C37.1 C38.1 C39.1 C40.1 C41.1 C42.1 C43.1 C44.1 C45.1 C46.1 C47.1 C48.2 C49.1 C50.1 C51.1 C52.1 C53.1 C54.1 C55.1 C56.1 C57.1 C58.1 C59.1 C60.1 C61.1 CAGE1.21 CON1.1 CON1.7 CON1.13 CON1.19 CON1.25 CON1.26 CON1.31 CON1.32 CON1.37 CON1.38 CON1.43 CON1.44 CON1.49 CON1.50 CON1.55 CON1.56 CON1.61 CON1.62 CON1.67 CON1.68 CON1.73 CON1.74 CON1.79 CON1.80 CON1.85 CON1.86 CON1.91 CON1.92 CON1.97 CON1.98 CON1.103 CON1.104 CON1.109 CON1.110 CON1.115 CON1.116 CON1.121 CON1.122 CON1.127 CON1.133 CON1.134 CON1.139 CON1.140 CON1.145 CON1.146 CON1.151 CON1.152 CON1.157 CON1.163 CON1.164 CON1.169 CON1.170 CON1.181 CON1.182 CON1.187 CON1.188 CON1.195 CON1.196 CON2.1 CON2.4 CON2.7 CON2.10 CON3.4 CON4.5 CON4.6 CON4.7 CON4.8 CON4.9 CON4.10 CON4.11 CON5.4 CON5.6 D1.1 LED1.1 P1.1 P3.11 P3.12 P3.25 P3.26 P4.1 P5.10 Q2.3 Q3.3 R5.1 R6.1 R9.1 R27.2 R28.2 R37.1 R40.1 R43.1 R55.1 R57.1 SW1.2 U1.3 U1.9 U1.13 U2.1 U3.7 U4.5 U5.34 U5.44 U6.5 U6.10 U7.1 U7.5 U7.7 Y1.3
GPIO8: CON1.27
GPIO9: CON1.29
GPIO10: CON1.33
GPIO11: CON1.35
GPIO12: CON1.45
GPIO13: CON1.47
GPIO17: CON1.59
GPIO19: CON1.65 CON3.2
GPIO20: CON1.69
GPIO21: CON1.71
GPIO22: CON1.75
GPIO23: CON1.77
GPIO24: CON1.81
GPIO25: CON1.83
GPIO26: CON1.87
GPIO27: CON1.89
GPIO30/CTS1: CON1.34 P3.17
GPIO31/RTS1: CON1.36 P3.20
GPIO32: CON1.46 P5.3
GPIO33: CON1.48 P5.4
GPIO34: CON1.52 P5.5
GPIO35: CON1.54
GPIO36: CON1.58 P5.7
GPIO37: CON1.60 P3.13
GPIO38: CON1.64 P3.15
GPIO39: CON1.66 P3.19
GPIO40/TXD1: CON1.70 P3.24 R20.1
GPIO41/RXD1: CON1.72 P3.23 P5.6
LOS_1: D3.1 P6.5 R46.1 R50.1
LOS_2: D4.1 P6.18 R48.1 R52.1
MOD_DEF_0_1: P6.9 R47.1 R51.1
MOD_DEF_0_2: P6.14 R49.1 R53.1
NetC7_2: C7.2 R3.1 U1.12
NetC13_1: C13.1 C15.2 L3.2 U3.2
NetC16_1: C16.1 CON2.15 R15.2 SW1.1
NetC26_1: C26.1 R33.2 T1.7
NetCON1_28: CON1.28 R6.2
NetCON1_30: CON1.30 R5.2
NetD1_2: D1.2 R7.1
NetD2_1: D2.1 Q1.3 Q2.1
NetD2_2: D2.2 R8.1
NetD3_2: D3.2 R44.2
NetD4_2: D4.2 R45.2
NetL1_1: L1.1 U1.8
NetL2_1: L2.1 U1.2
NetLED1_2: LED1.2 R20.2 R21.2
NetLED1_4: LED1.4 P4.2 R21.1
NetP1_2: P1.2 Q1.2 R9.2
NetP3_16: P3.16 R22.1
NetP3_29: P3.29 R25.2
NetP3_30: P3.30 R26.1
NetP5_1: P5.1 R23.2
NetP5_2: P5.2 R24.2
NetQ3_1: Q3.1 R42.2 TP22.1 U6.2
NetR27_1: R27.1 T1.5
NetR28_1: R28.1 T1.10
NetR34_1: R34.1 U5.41
NetR35_2: R35.2 T1.12
NetR36_2: R36.2 T1.15
NetR37_2: R37.2 U5.50
NetR38_1: R38.1 U5.28
NetR40_2: R40.2 U5.63
NLNKA_LED: T1.14 U5.21
NRESET: CON1.21 R41.1 TP19.1 U5.12
NSPD_LED: T1.13 U5.22
POE_V+: C14.2 C19.2 L3.1 P2.2 T1.6 U4.1
POE_V-: C14.1 C15.1 C17.1 C19.1 P2.1 T1.11 U3.1 U4.2
RATE_SEL_1: P6.7 R54.1
RATE_SEL_2: P6.16 R56.1
RST/GPIO18: CON1.63 CON3.5 TP3.1
RXD0/GPIO15: CON1.53 CON3.3 TP8.1
SFP/GPIO2/SDA1: CON1.9 P6.13 R58.1
SFP/GPIO3/SCL1: CON1.11 P6.11 R59.1
SFP/GPIO44/SDA1: CON1.82 P3.1 P5.8 P6.10 R11.1 R60.1 U7.3
SFP/GPIO45/SCL1: CON1.84 P3.2 P5.9 P6.12 R12.1 R61.1 U7.4
SFP_3V3: C12.2 C50.2 C51.2 C55.2 C57.2 C59.2 C61.2 L6.2 L7.2 L8.2 L9.2 R44.1 R45.1 R46.2 R47.2 R48.2 R49.2 R54.2 R56.2 R58.2 R59.2 R60.2 R61.2 U2.2 U7.2 U7.6 U7.8
SFP_LOS_1/GPIO16/CTS0: CON1.57 R50.2
SFP_LOS_2/GPIO43: CON1.78 R52.2
SFP_PRESENT_1/GPIO7: CON1.23 R51.2
SFP_PRESENT_2/GPIO42: CON1.76 R53.2
TX_DISABLE_1: P6.15 R55.2
TX_DISABLE_2: P6.8 R57.2
TX_FAULT_1: P6.17
TX_FAULT_2: P6.6
TXD0/GPIO14: CON1.51 CON3.6 TP7.1
USB_2_N: CON5.2 U5.1
USB_2_P: CON5.3 U5.2
USB_CM_N: CON1.167 R17.2 R19.2 TP6.1
USB_CM_P: CON1.165 R16.2 R18.2 TP5.1
USB_H_N: P3.28 R17.1
USB_H_P: P3.27 R16.1
USB_HUB_N: TP17.1 U5.58 U6.8
USB_HUB_P: TP18.1 U5.59 U6.9
USB_PROG_N: CON4.2 U6.6
USB_PROG_P: CON4.3 U6.7
USB_SW_N: R19.1 U6.3
USB_SW_P: R18.1 U6.4
VBUSB: CON4.1 P1.3 Q3.2 R43.2 TP20.1
VCCR_1: C54.2 C58.2 L8.1 P6.3
VCCR_2: C56.2 C60.2 L9.1 P6.1
VCCT_1: C52.2 L6.1 P6.4
VCCT_2: C53.2 L7.1 P6.2
VDD18CORE: C45.2 C46.2 C47.2 U5.15 U5.38
VDD18ETHPLL: C44.2 L5.2 U5.48
VDD18USBPLL: C43.2 L5.1 U5.62
VDD33A: C28.2 C29.2 C34.2 C35.2 C36.2 C37.2 C38.2 C39.2 C40.2 L4.2 R29.1 R30.1 R31.1 R32.1 R33.1 U5.5 U5.10 U5.49 U5.51 U5.54 U5.57 U5.64
XI: C42.2 R39.2 U5.61 Y1.2
XO: C41.2 R39.1 U5.60 Y1.1
pads on no net: CAGE1. CON1. CON1.4 CON1.6 CON1.8 CON1.10 CON1.12 CON1.14 CON1.16 CON1.18 CON1.20 CON1.22 CON1.24 CON1.88 CON1.93 CON1.94 CON1.95 CON1.96 CON1.99 CON1.100 CON1.101 CON1.102 CON1.105 CON1.106 CON1.107 CON1.108 CON1.111 CON1.112 CON1.113 CON1.114 CON1.117 CON1.118 CON1.119 CON1.120 CON1.123 CON1.124 CON1.125 CON1.126 CON1.128 CON1.129 CON1.130 CON1.131 CON1.132 CON1.135 CON1.136 CON1.137 CON1.138 CON1.141 CON1.142 CON1.143 CON1.144 CON1.148 CON1.150 CON1.154 CON1.156 CON1.158 CON1.160 CON1.162 CON1.166 CON1.168 CON1.171 CON1.172 CON1.173 CON1.174 CON1.175 CON1.176 CON1.177 CON1.178 CON1.179 CON1.180 CON1.MP1 CON1.MP2 CON4.4 CON5.5 FID1.1 FID2.1 MH1.1 MH3.1 MH4.1 MH5.1 MH6.1 P3.3 P3.4 P3.5 P3.6 P3.7 P3.8 P3.9 P3.10 P3.14 P3.18 P3.21 P3.22 T1. U1.5 U1.11 U3.3 U3.5 U3.8 U4. U4.4 U4.6 U5.3 U5.4 U5.6 U5.7 U5.8 U5.9 U5.13 U5.14 U5.16 U5.17 U5.18 U5.20 U5.23 U5.24 U5.25 U5.26 U5.29 U5.30 U5.31 U5.32 U5.35 U5.36 U5.37 U5.42 U5.43 U5.45 U5.47 U5.65
copper on no net:
  other v1: 96.903,39.435 98.003,39.435 99.103,39.435 100.203,39.435 101.303,39.435 102.403,39.435 103.503,39.435 96.903,40.535 98.003,40.535 99.103,40.535 100.203,40.535 101.303,40.535 102.403,40.535 103.503,40.535 96.903,41.635 98.003,41.635 99.103,41.635 100.203,41.635 101.303,41.635 102.403,41.635 103.503,41.635 96.903,42.736 98.003,42.736 99.103,42.736 100.203,42.736 101.303,42.736 102.403,42.736 103.503,42.736 96.903,43.836 98.003,43.836 99.103,43.836 100.203,43.836 101.303,43.836 102.403,43.836 103.503,43.836 96.903,44.936 98.003,44.936 99.103,44.936 100.203,44.936 101.303,44.936 102.403,44.936 103.503,44.936 96.903,46.036 98.003,46.036 99.103,46.036 100.203,46.036 101.303,46.036 102.403,46.036 103.503,46.036

## Polygon pours and split planes (outlines as drawn)
GND on Ground Plane (split plane): 153.485,60.439 153.952,60.298 154.382,60.068 154.759,59.759 155.068,59.382 155.298,58.952 155.439,58.485 155.49,57.975 155.49,-0.975 155.439,-1.485 155.298,-1.952 155.068,-2.382 154.759,-2.759 154.382,-3.068 153.952,-3.298 153.485,-3.439 152.975,-3.49 133.51,-3.49 133.51,7 133.508,7.029 133.507,7.057 133.482,7.28 133.481,7.287 133.48,7.294 133.47,7.336 133.461,7.378 133.458,7.384 133.457,7.391 133.383,7.602 133.38,7.609 133.378,7.616 133.359,7.654 133.341,7.693 133.336,7.699 133.333,7.705 133.214,7.895 133.21,7.901 133.206,7.907 133.179,7.94 133.153,7.974 133.147,7.979 133.143,7.984 132.984,8.143 132.979,8.147 132.974,8.153 132.94,8.179 132.907,8.206 132.901,8.21 132.895,8.214 132.706,8.333 132.699,8.336 132.693,8.341 132.654,8.359 132.616,8.378 132.609,8.38 132.602,8.383 132.391,8.457 132.384,8.458 132.378,8.461 132.336,8.47 132.294,8.48 132.287,8.481 132.28,8.482 132.057,8.507 132.028,8.508 132,8.51 115.5,8.51 115.471,8.508 115.443,8.507 115.22,8.482 115.213,8.481 115.206,8.48 115.164,8.47 115.122,8.461 115.116,8.458 115.109,8.457 114.898,8.383 114.891,8.38 114.884,8.378 114.846,8.359 114.807,8.341 114.801,8.336 114.794,8.333 114.605,8.214 114.599,8.21 114.593,8.206 114.56,8.179 114.526,8.153 114.521,8.147 114.516,8.143 114.357,7.984 114.353,7.979 114.347,7.974 114.321,7.94 114.294,7.907 114.29,7.901 114.286,7.895 114.167,7.705 114.164,7.699 114.159,7.693 114.141,7.654 114.122,7.616 114.12,7.609 114.117,7.602 114.043,7.391 114.042,7.384 114.039,7.378 114.03,7.336 114.02,7.294 114.019,7.287 114.018,7.28 113.993,7.057 113.992,7.029 113.99,7 113.99,-3.49 -0.975,-3.49 -1.485,-3.439 -1.952,-3.298 -2.382,-3.068 -2.759,-2.759 -3.068,-2.382 -3.298,-1.952 -3.439,-1.485 -3.49,-0.975 -3.49,57.975 -3.439,58.485 -3.298,58.952 -3.068,59.382 -2.759,59.759 -2.382,60.068 -1.952,60.298 -1.485,60.439 -0.975,60.49 152.975,60.49

## Keep-outs
Keep-Out Layer:
  the board outline again, w0.5

## Silkscreen, mask and mechanical layers (free items; w line width, h text height)
Mechanical 1:
  drawing of 460 lines, arcs and shapes, not listed
  text "Layer" at -0.38,172.275 h1.52
  text "Name" at 10.031,172.275 h1.52
  text "Material" at 33.901,172.275 h1.52
  text "Thickness" at 55.739,172.275 h1.52
  text "Constant" at 72.245,172.275 h1.52
  text "Board Layer Stack" at 86.719,172.275 h1.52
  text "1" at -0.38,169.227 h1.52
  text "Top Overlay" at 10.031,169.227 h1.52
  text "2" at -0.38,166.179 h1.52
  text "Top Solder" at 10.031,166.179 h1.52
  text "Solder Resist" at 33.901,166.179 h1.52
  text "0.40mil" at 55.739,166.179 h1.52
  text "3.5" at 72.245,166.179 h1.52
  text "3" at -0.38,163.131 h1.52
  text "Component Side" at 10.031,163.131 h1.52
  text "Copper" at 33.901,163.131 h1.52
  text "1.57mil" at 55.739,163.131 h1.52
  text "4" at -0.38,160.083 h1.52
  text "Dielectric 1" at 10.031,160.083 h1.52
  text "FR-4" at 33.901,160.083 h1.52
  text "9.45mil" at 55.739,160.083 h1.52
  text "4.6" at 72.245,160.083 h1.52
  text "5" at -0.38,157.035 h1.52
  text "Ground Plane" at 10.031,157.035 h1.52
  text "Copper" at 33.901,157.035 h1.52
  text "1.38mil" at 55.739,157.035 h1.52
  text "6" at -0.38,153.987 h1.52
  text "Dielectric 3" at 10.031,153.987 h1.52
  text "R-1755M" at 33.901,153.987 h1.52
  text "15.75mil" at 55.739,153.987 h1.52
  text "4.6" at 72.245,153.987 h1.52
  text "7" at -0.38,150.939 h1.52
  text "Power Plane" at 10.031,150.939 h1.52
  text "Copper" at 33.901,150.939 h1.52
  text "1.38mil" at 55.739,150.939 h1.52
  text "8" at -0.38,147.891 h1.52
  text "Dielectric 4" at 10.031,147.891 h1.52
  text "10.00mil" at 55.739,147.891 h1.52
  text "4.2" at 72.245,147.891 h1.52
  text "9" at -0.38,144.843 h1.52
  text "Solder Side" at 10.031,144.843 h1.52
  text "Copper" at 33.901,144.843 h1.52
  text "1.57mil" at 55.739,144.843 h1.52
  text "10" at -0.38,141.795 h1.52
  text "Bottom Solder" at 10.031,141.795 h1.52
  text "Solder Resist" at 33.901,141.795 h1.52
  text "0.40mil" at 55.739,141.795 h1.52
  text "3.5" at 72.245,141.795 h1.52
  text "11" at -0.38,138.747 h1.52
  text "Bottom Overlay" at 10.031,138.747 h1.52

## Dimensions
152,57 to 136.561,50.896 on Mechanical 1
136.561,50.896 to 152,57 on Mechanical 1
156,58 to -4,58 on Mechanical 1
152,57 to 153,61 on Mechanical 1
152,57 to 156,58 on Mechanical 1
133,-4 to 114.5,-4 on Mechanical 1
133,-4 to 132,8 on Mechanical 1
153,61 to 153,-4 on Mechanical 1

## Text inside footprints (layer, text, board x,y; h text height)
CON1: Mechanical 29 "compute module" at 62.674,36.167 h2 r180
P3: Top Overlay "1" at -2.286,53.975 h1.27 r270; Top Overlay "2" at 0.254,53.975 h1.27 r270
P5: Top Overlay "6" at 151.257,29.401 h1.27 r90; Top Overlay "1" at 153.797,29.401 h1.27 r90
P6: Top Overlay "1" at 136.053,53.436 h1.27 r270; Top Overlay "2" at 138.593,53.944 h1.27 r270
T1: Top Overlay "15" at 96.763,27.358 h0.5 r180; Top Overlay "12" at 112.013,27.608 h0.5 r180; Top Overlay "11" at 97.263,15.358 h0.5 r180; Top Overlay "10" at 111.513,15.358 h0.5 r180; Top Overlay "7" at 111.513,24.858 h0.5 r180; Top Overlay "6" at 97.763,22.358 h0.5 r180; Top Overlay "1" at 110.513,22.358 h0.5 r180